# Allegro board ece457.1.brd
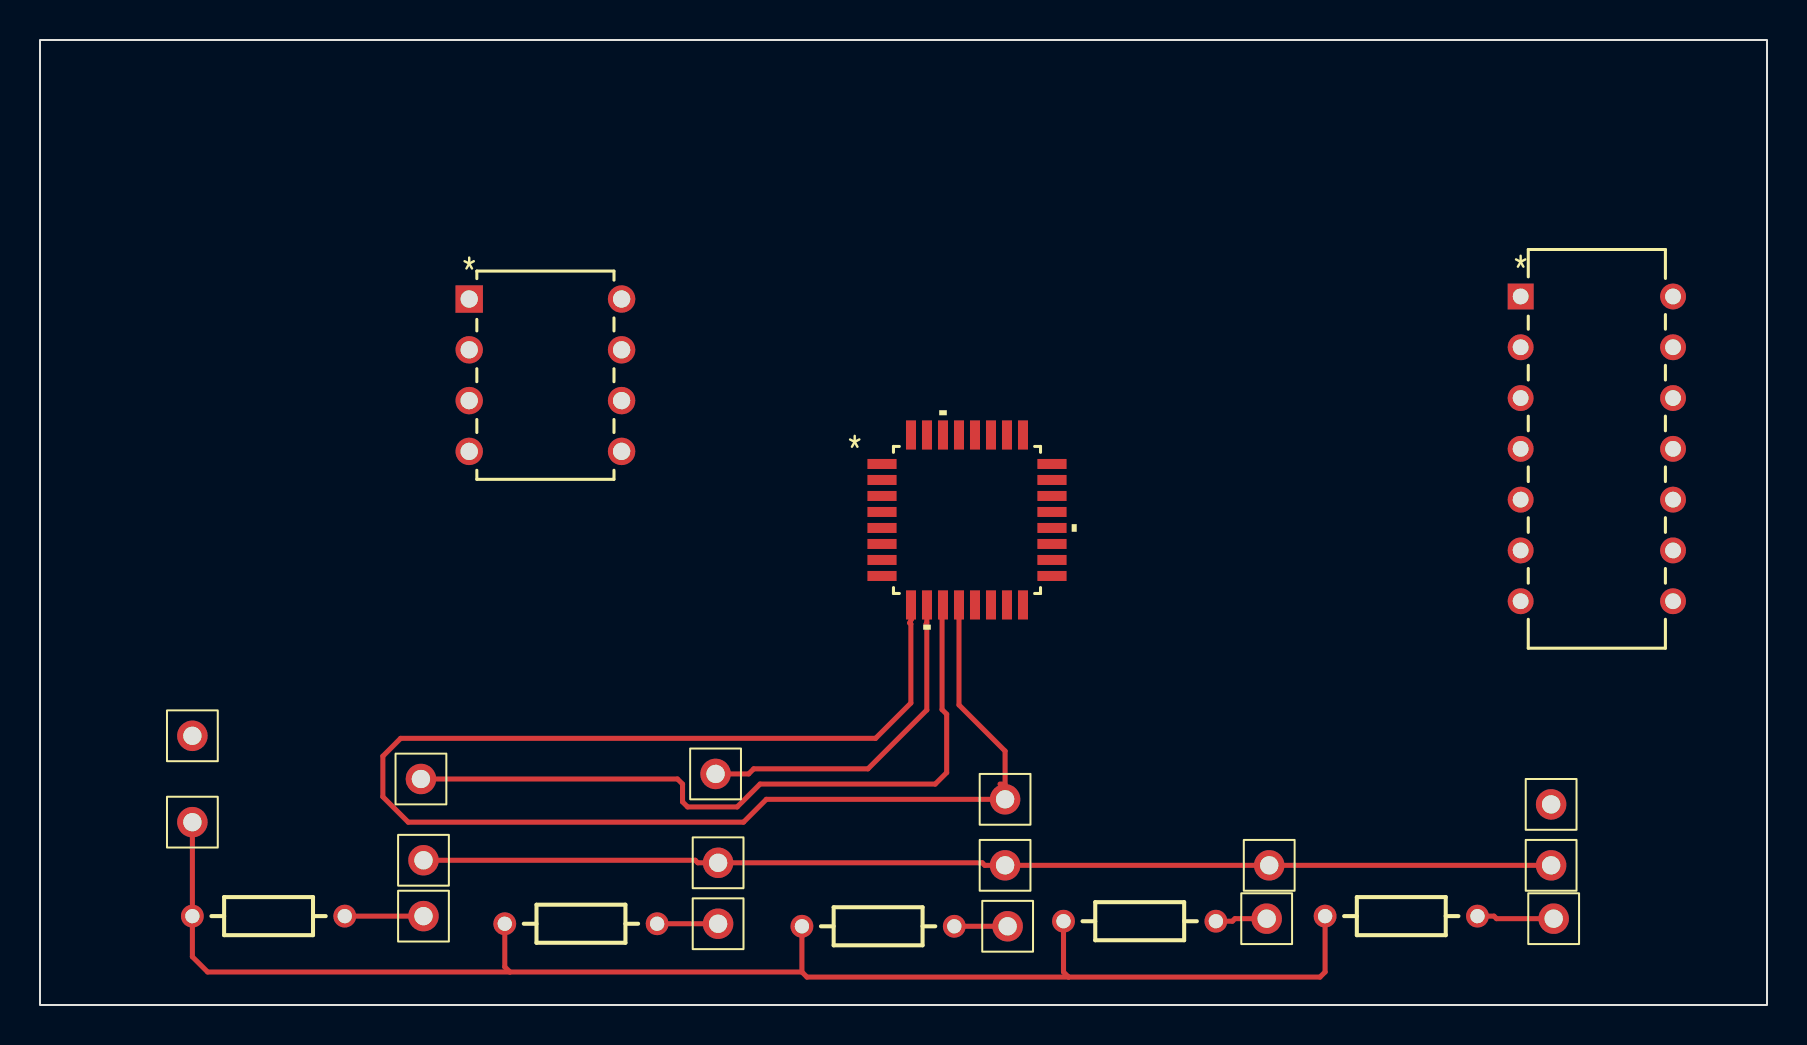
[diagram p0: board, top side]
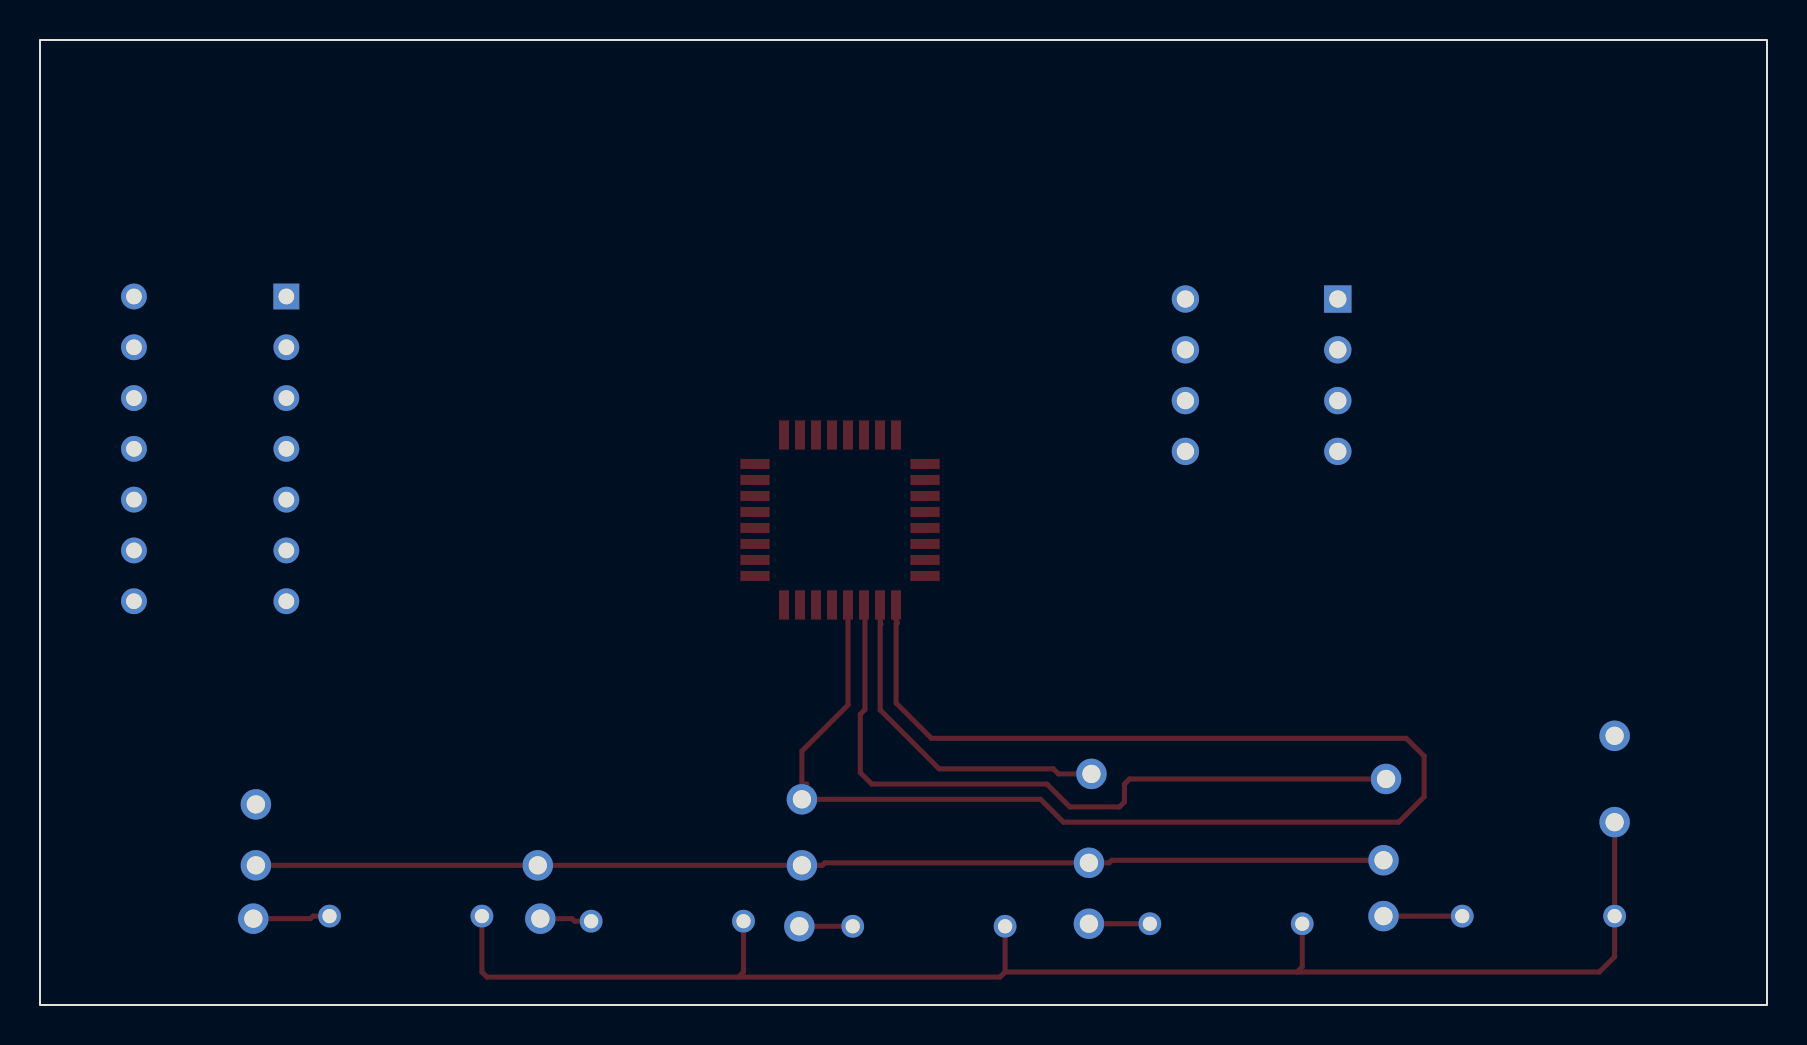
[diagram p1: board, bottom side, seen from below]

Outline 86.36 x 48.26 mm; copper layers: TOP, BOTTOM. Coordinates in mm from the lower left corner of the outline.
Outline path: rectangle 0,0 86.36,48.26

## Design rules (mm)
constraint set DEFAULT: min track width 0.254

## Placement (name value [footprint] x y rotation side)
J15  CON1  [JUMPER1]  19.18 7.24 0 top
J16  CON1  [JUMPER1]  19.18 4.45 0 top
J17  CON1  [JUMPER1]  19.05 11.3 0 top
J18  CON1  [JUMPER1]  33.91 7.11 0 top
J19  CON1  [JUMPER1]  33.91 4.06 0 top
J20  CON1  [JUMPER1]  33.78 11.56 0 top
J21  CON1  [JUMPER1]  48.26 6.98 0 top
J22  CON1  [JUMPER1]  48.39 3.94 0 top
J23  CON1  [JUMPER1]  48.26 10.29 0 top
J24  CON1  [JUMPER1]  61.47 6.98 0 top
J25  CON1  [JUMPER1]  61.34 4.32 0 top
J27  CON1  [JUMPER1]  75.56 6.98 0 top
J28  CON1  [JUMPER1]  75.69 4.32 0 top
J29  CON1  [JUMPER1]  7.62 13.46 0 top
J32  CON1  [JUMPER1]  7.62 9.14 0 top
J33  CON1  [JUMPER1]  75.56 10.03 0 top
R9  4.7k  [AXRC05]  64.26 4.45 0 top
R10  4.7k  [AXRC05]  51.18 4.19 0 top
R11  4.7k  [AXRC05]  38.1 3.94 0 top
R12  4.7k  [AXRC05]  23.24 4.06 0 top
R13  4.7k  [AXRC05]  7.62 4.45 0 top
U11  ATMEGA328PB-AUR  [32A]  46.35 24.26 0 top
U12  UA741CPE4  [P8]  21.46 35.31 0 top
U13  CD4066BE  [N14]  74.04 35.43 0 top

## Library data of the parts
J15-J25 J27-J29 J32 J33 = CON1: User Part Number: ***
R9-R13 = R
U11 = ATMEGA328PB-AUR: User Part Number: PN; Tolerance: TOL
U12 = UA741CPE4: User Part Number: PN; Tolerance: TOL
U13 = CD4066BE: User Part Number: PN; Tolerance: TOL

## Footprints (pads in the part's own frame, mm; a bottom-side part is the same pattern mirrored in y, then rotated)
32A
  rect 1.461x0.501 smd: 1(-4.25,2.8) 2(-4.25,2) 3(-4.25,1.2) 4(-4.25,0.4) 5(-4.25,-0.4) 6(-4.25,-1.2) 7(-4.25,-2) 8(-4.25,-2.8) 17(4.25,-2.8) 18(4.25,-2) 19(4.25,-1.2) 20(4.25,-0.4) 21(4.25,0.4) 22(4.25,1.2) 23(4.25,2) 24(4.25,2.8)
  rect 0.501x1.461 smd: 9(-2.8,-4.25) 10(-2,-4.25) 11(-1.2,-4.25) 12(-0.4,-4.25) 13(0.4,-4.25) 14(1.2,-4.25) 15(2,-4.25) 16(2.8,-4.25) 25(2.8,4.25) 26(2,4.25) 27(1.2,4.25) 28(0.4,4.25) 29(-0.4,4.25) 30(-1.2,4.25) 31(-2,4.25) 32(-2.8,4.25)
AXRC05
  round 1.143 hole 0.711: 1(0,0) 2(7.62,0)
JUMPER1
  round 1.524 hole 0.914: 1(0,0)
N14
  rect 1.295x1.295 hole 0.787: 1(0,0)
  round 1.295 hole 0.787: 2(0,-2.54) 3(0,-5.08) 4(0,-7.62) 5(0,-10.16) 6(0,-12.7) 7(0,-15.24) 8(7.62,-15.24) 9(7.62,-12.7) 10(7.62,-10.16) 11(7.62,-7.62) 12(7.62,-5.08) 13(7.62,-2.54) 14(7.62,0)
P8
  rect 1.372x1.372 hole 0.864: 1(0,0)
  round 1.372 hole 0.864: 2(0,-2.54) 3(0,-5.08) 4(0,-7.62) 5(7.62,-7.62) 6(7.62,-5.08) 7(7.62,-2.54) 8(7.62,0)

## Nets
AVCC: U11.18
GND: U11.3
GND_1: U11.5
VCC: U11.4
VCC_1: U11.6(VCC_1)
VSS: U13.7(VSS)
0: J32.1 R9.1 R10.1 R11.1 R12.1 R13.1 U11.19 U11.21 U12.2 U12.4(VCC-)
N19304: J15.1 J18.1 J21.1 J24.1 J27.1 U11.20 U11.22 U13.14
N19316: U12.3
N19318: U11.12 U12.6
N19334: U11.29 U13.13
N19340: U11.28 U13.5
N19356: U13.2
N19360: U13.4
N19364: U13.1
N19382: U13.3
N19398: J17.1 U11.11
N19406: J20.1 U11.10
N19414: J23.1 U11.9
N19422: U11.8
N19430: J33.1 U11.7
N19452: J29.1 U12.7
N19484: J28.1 R9.2
N19488: J25.1 R10.2
N19492: J22.1 R11.2
N19496: J19.1 R12.2
N19500: J16.1 R13.2

Pads without a net: U11 1 2 13 14 15 16 17 23 24 25 26 27 30 31 32; U12 1 5 8; U13 6 8 9 10 11 12

## Routing (per net, layer and track width the routed paths; a pad name or vN(x,y) marks a point on that pad's centre or on a via; arc(x,y) is an arc through that point)
0: length 74.4
  TOP w0.254: R12.1 23.24,1.9 23.5,1.65 ; 51.44,1.4 51.18,1.65 R10.1 ; 51.44,1.4 64.01,1.4 64.26,1.65 R9.1 ; 51.44,1.4 38.35,1.4 38.1,1.65 ; 38.1,1.65 R11.1 ; 38.1,1.65 23.5,1.65 ; 23.5,1.65 8.38,1.65 7.62,2.41 R13.1 J32.1
N19304: length 56.5
  TOP w0.254: J27.1 J24.1 J21.1 47.24,6.98 47.12,7.11 J18.1 32.89,7.11 32.77,7.24 J15.1
N19318: length 10.2
  TOP w0.254: U11.12 45.95,15.01 48.26,12.7 48.26,11.05 48.01,11.05
N19398: length 36.6
  TOP w0.254: U11.11 45.19,19.97 45.19,19.71 45.11,19.62 45.11,14.77 45.34,14.54 45.34,11.62 44.77,11.05 36.01,11.05 34.86,9.91 32.38,9.91 32.13,10.16 32.13,11.05 31.88,11.3 J17.1
N19406: length 17.2
  TOP w0.254: J20.1 35.44,11.56 35.69,11.81 41.4,11.81 44.35,14.75 44.35,19.02 44.31,19.05 44.35,19.12 44.35,19.94 44.39,19.98 U11.10
N19414: length 66.6
  TOP w0.254: U11.9 43.58,19.98 43.58,19.3 43.49,19.11 43.55,19.05 43.55,15.1 41.78,13.33 18.03,13.33 17.14,12.45 17.14,10.41 18.41,9.14 35.18,9.14 36.32,10.29 J23.1
N19484: length 3.9
  TOP w0.254: J28.1 72.83,4.32 72.71,4.45 R9.2
N19488: length 2.6
  TOP w0.254: R10.2 59.63,4.19 59.75,4.32 J25.1
N19492: length 2.7
  TOP w0.254: J22.1 R11.2
N19496: length 3
  TOP w0.254: J19.1 30.86,4.06
N19500: length 3.9
  TOP w0.254: J16.1 R13.2
